# EAGLE board Schemat termometru pcb v2 (EAGLE 9.4.1)

Size 100 x 80 mm. Coordinates in mm from the lower left corner, seen from the top.
Outline: 0,0 100,0 100,80 0,80 0,0
Copper layers (1*16): Top 0.035mm / dielectric 1.5mm / Bottom 0.035mm
Design rules "default": minimum track width 6mil, minimum drill 0.35mm, track to track 6mil, track to pad 6mil, pad to pad 6mil, via to via 6mil, smd to smd 6mil, copper to edge 40mil, drill to drill 6mil, minimum pad ring 10mil, minimum via ring 8mil, stop-mask expansion 4mil, vias tented up to drill 0mil, thermal gap 10mil

## Footprints (pad centres in the part's own frame; a part is rotated, then mirrored left to right if it is on the bottom)
0204/7 = drill 0.813 octagon: 1 -3.81,0; 2 3.81,0
C025-040X050 = drill 0.813 octagon: 1 -1.27,0; 2 1.27,0
MA04-1 = drill 1.016 long: 1 -3.81,0; 2 -1.27,0; 3 1.27,0; 4 3.81,0
TO92 = drill 0.813 octagon: 1 1.27,0; 2 0,1.905; 3 -1.27,0
DIL28-3 = drill 0.813 long: 1 -16.51,-3.81; 2 -13.97,-3.81; 3 -11.43,-3.81; 4 -8.89,-3.81; 5 -6.35,-3.81; 6 -3.81,-3.81; 7 -1.27,-3.81; 8 1.27,-3.81; 9 3.81,-3.81; 10 6.35,-3.81; 11 8.89,-3.81; 12 11.43,-3.81; 13 13.97,-3.81; 14 16.51,-3.81; 15 16.51,3.81; 16 13.97,3.81; 17 11.43,3.81; 18 8.89,3.81; 19 6.35,3.81; 20 3.81,3.81; 21 1.27,3.81; 22 -1.27,3.81; 23 -3.81,3.81; 24 -6.35,3.81; 25 -8.89,3.81; 26 -11.43,3.81; 27 -13.97,3.81; 28 -16.51,3.81
TUXGR_16X2_R2 = drill 1 pad 1.676: 1 -32,15.5; 2 -29.46,15.5; 3 -26.92,15.5; 4 -24.38,15.5; 5 -21.84,15.5; 6 -19.3,15.5; 7 -16.76,15.5; 8 -14.22,15.5; 9 -11.68,15.5; 10 -9.14,15.5; 11 -6.6,15.5; 12 -4.06,15.5; 13 -1.52,15.5; 14 1.02,15.5; 15 3.56,15.5; 16 6.1,15.5 | hole 2.5: -37.5,-15.5; 37.5,-15.5; -37.5,15.5; 37.5,15.5
LED5MM = drill 0.813 octagon: A -1.27,0; K 1.27,0
PT-10 = drill 1.016 pad 1.778 octagon: 1 -2.54,-5.08; 2 2.54,-5.08; 3 0,5.08
0207/10 = drill 0.813 octagon: 1 -5.08,0; 2 5.08,0
UM1 = drill 0.7 pad 1.2: 1 -1.875,0; 2 -0.027,0; 3 1.875,0
LZR182 = drill 0.813 octagon: A1 -1.27,1.27; A2 -1.27,-1.27; K1 1.27,1.27; K2 1.27,-1.27
TO220H = drill 1.118 long: 1 -2.54,-10.16; 2 0,-10.16; 3 2.54,-10.16 | hole 3.302: 0,4.826
EDG-02 = drill 0.813 long: 1 -1.27,-3.81; 2 1.27,-3.81; 3 1.27,3.81; 4 -1.27,3.81

## Placement (x,y rotation side)
+5__GND  [0204/7]  85.09,5.08 180 top
C1  [C025-040X050]  30.48,43.18 270 top
C2  [C025-040X050]  31.75,29.21 90 top
C5  [C025-040X050]  38.1,43.18 90 top
C6  [C025-040X050]  59.69,45.72 90 top
C7  [C025-040X050]  90.17,38.1 0 top
C8  [C025-040X050]  91.44,15.24 0 top
CZUJNIK1  [MA04-1]  72.39,25.4 90 top
CZUJNIK2  BC238  [TO92]  62.23,54.61 0 top
IC1  MEGA8-P  [DIL28-3]  49.53,40.64 270 top
LCD  TUXGR_16X2_R2  [TUXGR_16X2_R2]  33.02,91.44 180 top
LED2  [LED5MM]  21.59,10.16 0 top
POTENCJOMETR1  [PT-10]  17.78,53.34 0 top
POTENCJOMETR2  [PT-10]  77.47,69.85 0 top
R1  [0207/10]  66.04,39.37 0 top
R2  [0207/10]  17.78,67.31 270 top
R3  [0207/10]  81.28,58.42 180 top
R5  [0207/10]  80.01,44.45 0 top
R6  [0207/10]  81.28,48.26 0 top
R9  [0207/10]  38.1,64.77 0 top
REZONATOR  16M20AUM1  [UM1]  25.4,36.83 270 top
RGB  LZR182  [LZR182]  93.98,44.45 270 top
S1  16M20AUM1  [UM1]  46.99,7.62 90 top
S2  16M20AUM1  [UM1]  58.42,7.62 90 top
S3  16M20AUM1  [UM1]  66.04,7.62 90 top
STABILIZATOR5V  7805T  [TO220H]  96.52,26.67 270 top
SW1  [EDG-02]  92.71,63.5 180 top

## Library data of the parts
+5__GND R1-R3 R5 R6 R9 = rcl; SPICEPREFIX: R
C1 C2 C5-C8 = rcl; SPICEPREFIX: C
CZUJNIK1 = con-lstb; OC_FARNELL: unknown; OC_NEWARK: unknown
CZUJNIK2 = transistor-neu-to92
IC1 = atmel; OC_FARNELL: unknown; OC_NEWARK: unknown
LCD = display-lcd; OC_FARNELL: unknown; OC_NEWARK: unknown
LED2 RGB = led
POTENCJOMETR1 POTENCJOMETR2 = rcl; SPICEMODEL: POT; SPICEPREFIX: X
REZONATOR S1-S3 = crystal; OC_FARNELL: unknown; OC_NEWARK: unknown
STABILIZATOR5V = linear
SW1 = special

## Nets
DIPSWITCH: RGB.K1 RGB.K2 SW1.3
N$1: R3.1 SW1.4
N$2: IC1.18 R5.1
N$3: R5.2 RGB.A1
N$4: CZUJNIK2.2 IC1.23
N$5: CZUJNIK1.3 IC1.19 R1.2
N$6: IC1.16 S3.3
N$7: IC1.15 S2.3
N$8: IC1.14 S1.3
N$9: POTENCJOMETR1.3 R2.2
N$10: LED2.A SW1.1
N$11: LCD.15 R2.1
N$12: IC1.17 R6.1
N$13: LCD.3 POTENCJOMETR2.3
N$14: R6.2 RGB.A2
N$15: C2.2 IC1.9 REZONATOR.3
N$16: IC1.4 LCD.4
N$17: C1.2 IC1.10 REZONATOR.1
N$18: C5.1 C6.1 C8.1 CZUJNIK1.4 CZUJNIK2.3 IC1.7 IC1.20 LCD.2 POTENCJOMETR1.2 POTENCJOMETR2.2 R1.1 R3.2 R9.1 STABILIZATOR5V.3
N$19: +5__GND.2 C1.1 C2.1 C5.2 C6.2 C7.2 C8.2 CZUJNIK1.1 CZUJNIK2.1 IC1.8 IC1.22 LCD.1 LCD.5 LCD.16 LED2.K POTENCJOMETR2.1 S1.1 S2.1 S3.1 STABILIZATOR5V.2 SW1.2
N$20: IC1.1 R9.2
N$21: IC1.5 LCD.6
N$22: IC1.13 LCD.14
N$23: IC1.12 LCD.13
N$24: IC1.11 LCD.12
N$25: IC1.6 LCD.11
N$26: +5__GND.1 C7.1 STABILIZATOR5V.1

## Tracks (layer width: path | path; a pad name or v marks a point on that pad's centre or on a via)
DIPSWITCH  (2 unrouted)
N$1  (1 unrouted)
N$2  (1 unrouted)
N$3  (1 unrouted)
N$4  (1 unrouted)
N$5  (2 unrouted)
N$6  (1 unrouted)
N$7  (1 unrouted)
N$8  (1 unrouted)
N$9  (1 unrouted)
N$10  (1 unrouted)
N$11  (1 unrouted)
N$12  (1 unrouted)
N$13  (1 unrouted)
N$14  (1 unrouted)
N$15  (2 unrouted)
N$16  (1 unrouted)
N$17  (2 unrouted)
N$18  (13 unrouted)
N$19  (20 unrouted)
N$20  (1 unrouted)
N$21  (1 unrouted)
N$22  (1 unrouted)
N$23  (1 unrouted)
N$24  (1 unrouted)
N$25  (1 unrouted)
N$26  (2 unrouted)